# EAGLE board ADE9153A_Ic (EAGLE 9.6.2)
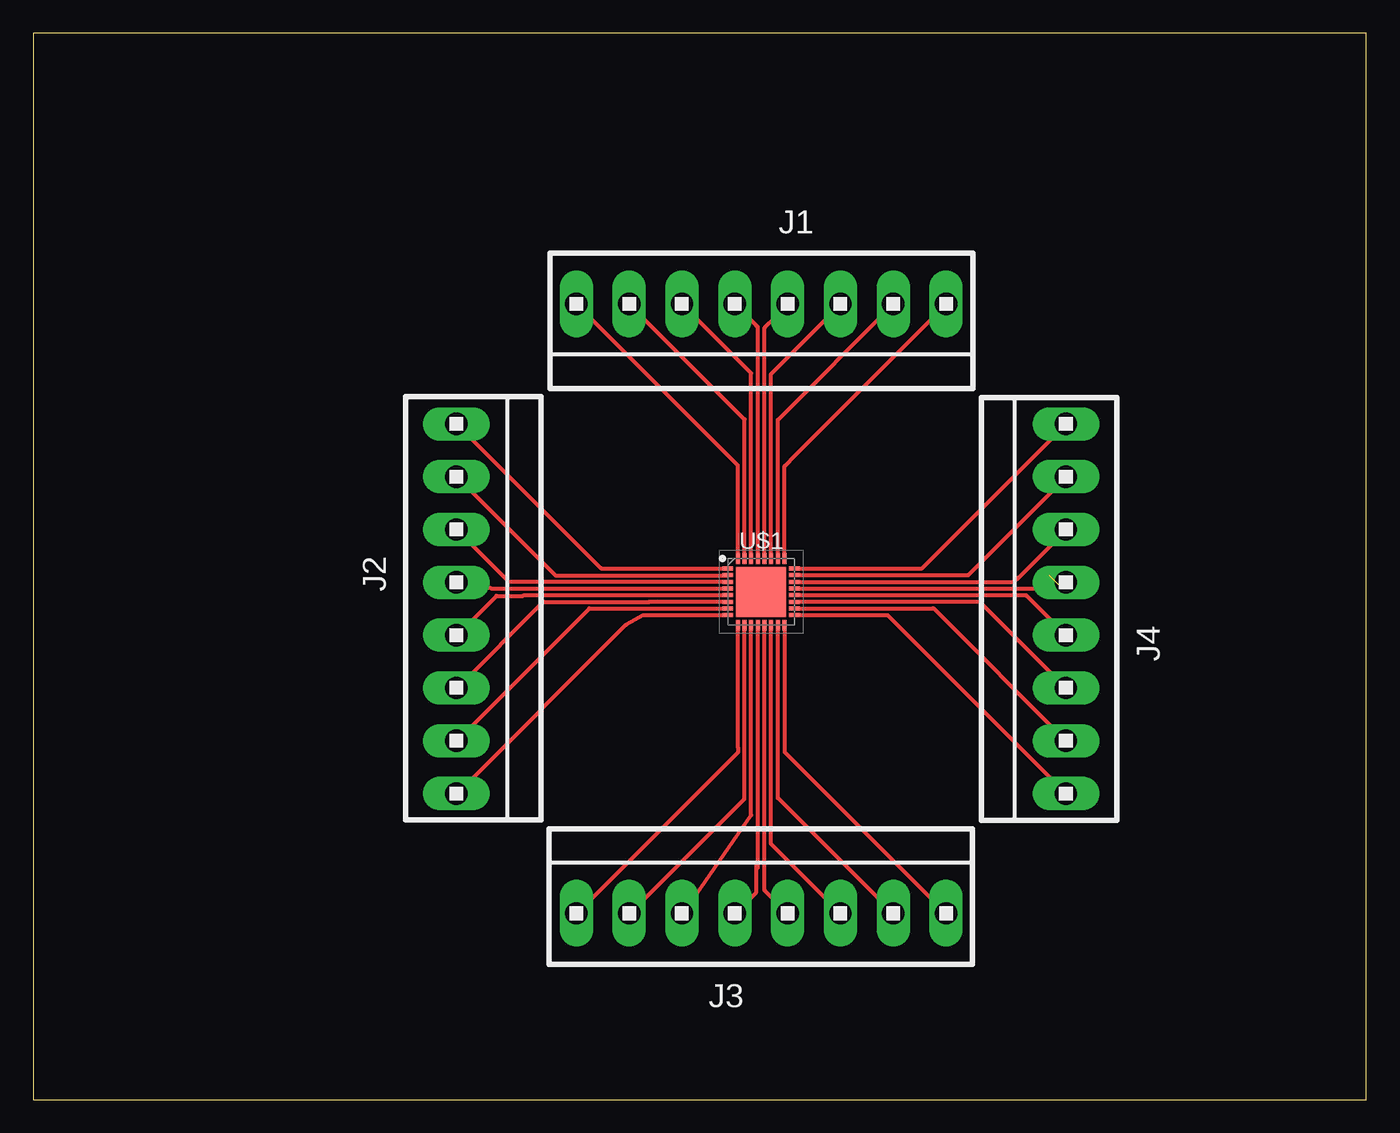
[diagram p0: board, top side]

Size 100 x 80 mm. Coordinates in mm from the lower left corner, seen from the top.
Outline: 0,0 100,0 100,80 0,80 0,0
Copper layers (1*16): Top 0.035mm / dielectric 1.5mm / Bottom 0.035mm
Design rules "default": minimum track width 6mil, minimum drill 0.35mm, track to track 6mil, track to pad 6mil, pad to pad 6mil, via to via 6mil, smd to smd 6mil, copper to edge 40mil, drill to drill 6mil, minimum pad ring 10mil, minimum via ring 8mil, stop-mask expansion 4mil, vias tented up to drill 0mil, thermal gap 10mil

## Footprints (pad centres in the part's own frame; a part is rotated, then mirrored left to right if it is on the bottom)
1X8MTA = drill 1.676 long: 1 13.868,0; 2 9.906,0; 3 5.944,0; 4 1.981,0; 5 -1.981,0; 6 -5.944,0; 7 -9.906,0; 8 -13.868,0
QFN50P500X500X80-33N = smd 0.8 x 0.3: 1 -2.5,1.75; 2 -2.5,1.25; 3 -2.5,0.75; 4 -2.5,0.25; 5 -2.5,-0.25; 6 -2.5,-0.75; 7 -2.5,-1.25; 8 -2.5,-1.75; 17 2.5,-1.75; 18 2.5,-1.25; 19 2.5,-0.75; 20 2.5,-0.25; 21 2.5,0.25; 22 2.5,0.75; 23 2.5,1.25; 24 2.5,1.75 | smd 0.3 x 0.8: 9 -1.75,-2.5; 10 -1.25,-2.5; 11 -0.75,-2.5; 12 -0.25,-2.5; 13 0.25,-2.5; 14 0.75,-2.5; 15 1.25,-2.5; 16 1.75,-2.5; 25 1.75,2.5; 26 1.25,2.5; 27 0.75,2.5; 28 0.25,2.5; 29 -0.25,2.5; 30 -0.75,2.5; 31 -1.25,2.5; 32 -1.75,2.5 | smd 3.75 x 3.75: 33 0,0

## Placement (x,y rotation side)
J1  [1X8MTA]  54.61,59.69 180 top
J2  [1X8MTA]  31.75,36.83 270 top
J3  [1X8MTA]  54.61,13.97 0 top
J4  [1X8MTA]  77.47,36.83 90 top
U$1  ADE9153AACPZ  [QFN50P500X500X80-33N]  54.61,38.1 0 top

## Library data of the parts
J1-J4 = con-amp
U$1 = ADE9153AACPZ; AVAILABILITY: In Stock; DESCRIPTION: Energy Metering IC with Autocalibration; MF: Analog Devices; MP: ADE9153AACPZ; PACKAGE: LFCSP -32 Analog Devices; PRICE: None; PURCHASE-URL: https://pricing.snapeda.com/search/part/ADE9153AACPZ/?ref=eda

## Nets
1: J2.8 U$1.1
2: J2.7 U$1.2
3: J2.6 U$1.3
4: J2.5 U$1.4
5: J2.4 U$1.5
6: J2.3 U$1.6
7: J2.2 U$1.7
8: J2.1 U$1.8
9: J3.8 U$1.9
10: J3.7 U$1.10
11: J3.6 U$1.11
12: J3.5 U$1.12
13: J3.4 U$1.13
14: J3.3 U$1.14
15: J3.2 U$1.15
16: J3.1 U$1.16
17: J4.8 U$1.17
18: J4.7 U$1.18
19: J4.6 U$1.19
20: J4.5 U$1.20
21: J4.4 U$1.21
22: J4.3 U$1.22
23: J4.2 U$1.23
24: J4.1 U$1.24
25: J1.8 U$1.25
26: J1.7 U$1.26
27: J1.6 U$1.27
28: J1.5 U$1.28
29: J1.4 U$1.29
30: J1.3 U$1.30
31: J1.2 U$1.31
32: J1.1 U$1.32
33: U$1.33

## Tracks (layer width: path | path; a pad name or v marks a point on that pad's centre or on a via)
1
  Top 0.305: U$1.1 42.6,39.85 J2.8
2
  Top 0.305: J2.7 39.17,39.32 52.14,39.32 U$1.2
3
  Top 0.305: J2.6 35.66,38.86 51.97,38.86 U$1.3
4
  Top 0.305: 51.97,38.35 U$1.4 34.33,38.35 34.19,38.41 32.16,38.41 J2.5
5
  Top 0.305: U$1.5 36.87,37.85 36.73,37.8 34.75,37.8 31.85,34.9 J2.4
6
  Top 0.305: 52.12,37.34 U$1.6 46.88,37.35 46.8,37.37 46.77,37.35 46.24,37.35 46.23,37.34 38.25,37.34 31.85,30.94 J2.3
7
  Top 0.305: U$1.7 41.73,36.85 31.85,26.98 J2.2
8
  Top 0.305: U$1.8 45.76,36.35 44.47,35.63 31.85,23.01 J2.1
9
  Top 0.305: U$1.9 52.86,26.43 52.86,26.04 52.73,25.91 52.15,25.32 40.84,14.02 J3.8
10
  Top 0.305: 53.34,35.46 U$1.10 53.34,35.51 53.34,22.55 44.81,14.02 J3.7
11
  Top 0.305: U$1.11 53.86,21.36 48.72,13.92 48.72,13.99 J3.6
12
  Top 0.305: U$1.12 54.36,17.4 54.25,17.52 54.25,15.54 52.73,14.02 J3.5
13
  Top 0.305: J3.4 54.86,15.7 54.86,35.51 U$1.13
14
  Top 0.305: U$1.14 55.36,19.16 J3.3
15
  Top 0.305: U$1.15 55.86,22.63 J3.2
16
  Top 0.305: 56.39,35.46 U$1.16 56.39,35.51 56.39,26.06 J3.1
17
  Top 0.305: U$1.17 64.08,36.35 J4.8
18
  Top 0.305: J4.7 67.51,36.88 67.48,36.85 57.21,36.85 57.2,36.85 57.19,36.85 U$1.18
19
  Top 0.305: J4.6 71.02,37.34 57.15,37.34 U$1.19
20
  Top 0.305: J4.5 74.57,37.74 74.52,37.8 74.47,37.85 U$1.20
21  (1 unrouted)
  Top 0.305: 77.11,38.41 77.42,38.71 J4.4 | U$1.21 75.18,38.35 76.2,39.37
22
  Top 0.305: J4.3 77.42,42.67 73.89,39.14 73.61,38.86 73.6,38.85 U$1.22
23
  Top 0.305: J4.2 77.42,46.63 70.1,39.32 70.07,39.35 U$1.23
24
  Top 0.305: J4.1 77.42,50.6 67.39,40.56 66.75,39.93 66.67,39.85 U$1.24
25
  Top 0.305: J1.8 68.43,59.59 57.12,48.28 56.39,47.55 56.36,47.52 U$1.25
26
  Top 0.305: J1.7 64.47,59.59 55.86,50.98 U$1.26
27
  Top 0.305: J1.6 60.5,59.59 55.7,54.79 55.47,54.56 55.36,54.45 U$1.27
28
  Top 0.305: J1.5 56.54,59.59 55.63,58.67 54.86,57.91 U$1.28
29
  Top 0.305: J1.4 53.62,58.7 54.25,58.06 54.36,57.96 U$1.29
30
  Top 0.305: U$1.30 53.86,54.5 J1.3
31
  Top 0.305: U$1.31 53.36,51.03 J1.2
32
  Top 0.305: J1.1 52.12,48.31 52.73,47.7 52.86,47.57 U$1.32